# Altium PCB Mini Multi Function Device_F.PcbDoc (part 1 of 2)
Units mm, origin at the board's own origin, x right, y up, seen from the top; angles counter-clockwise.
Board outline 25.03 x 34.92 mm, 2 copper layers (Top Layer, Bottom Layer), stack 0.51 mm thick; 32 components, 32 nets, 155 pads, 45 vias.
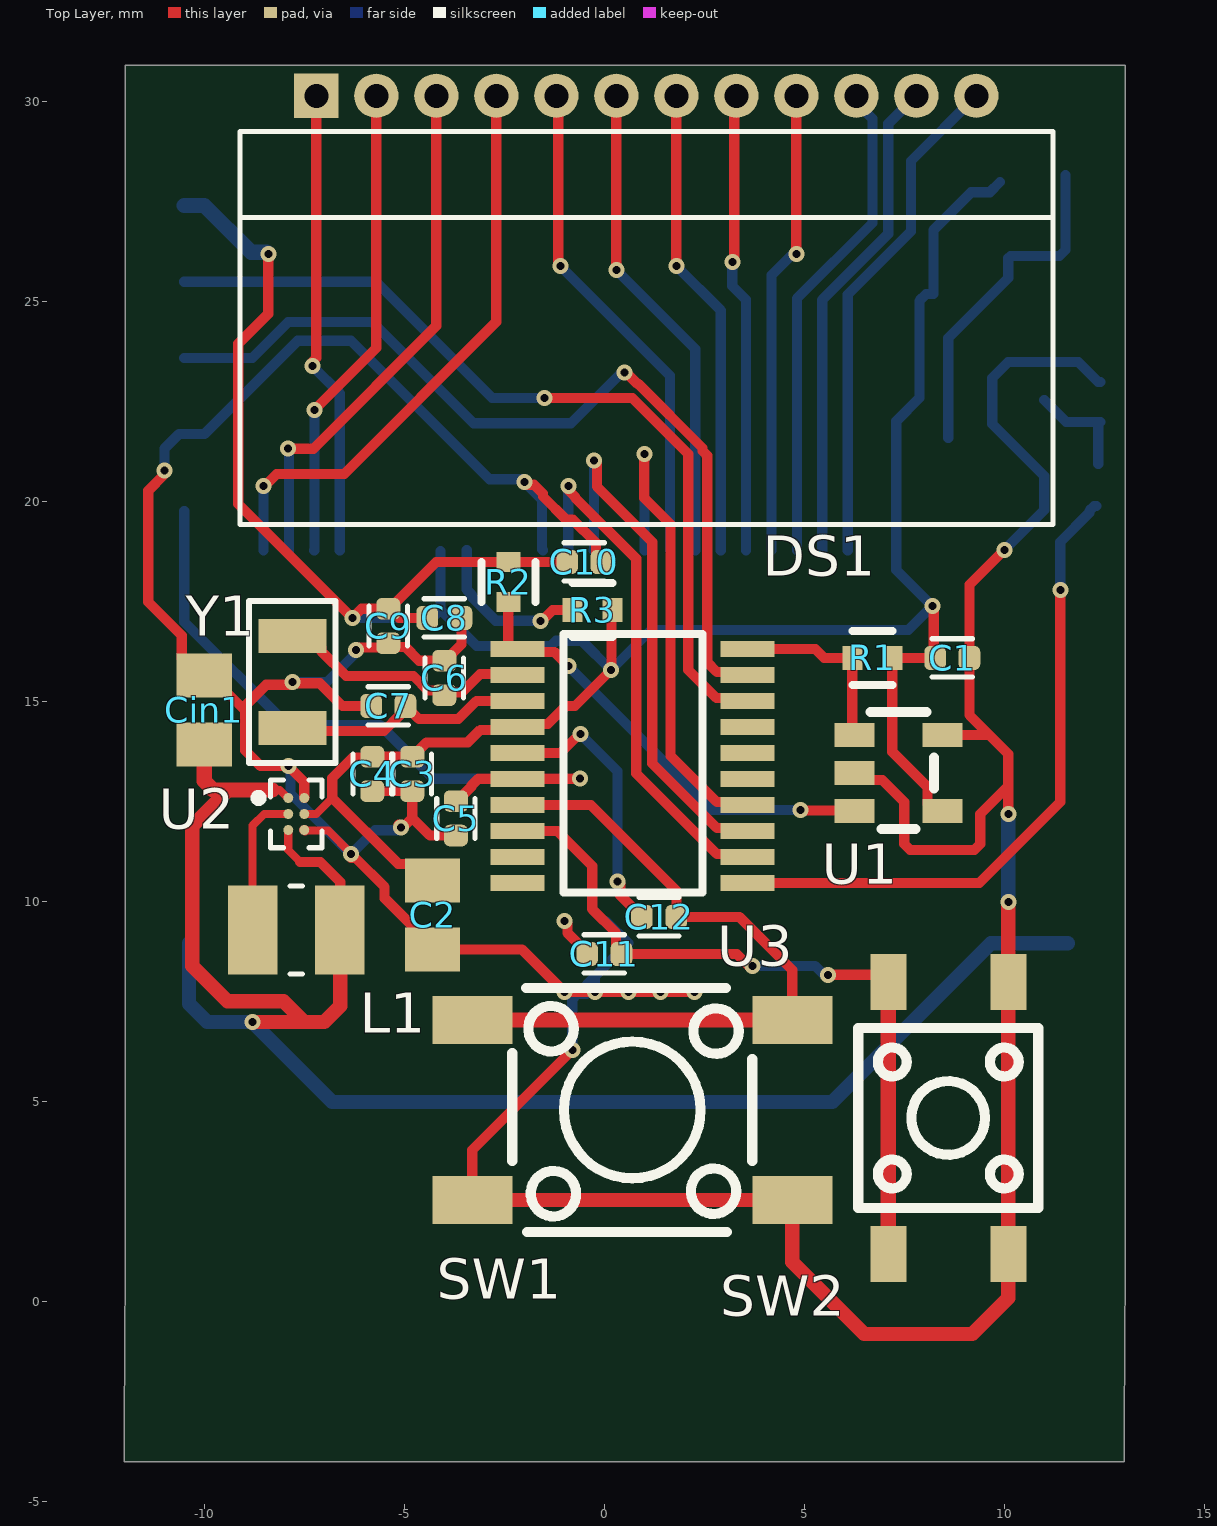
[diagram p0: Top Layer view]
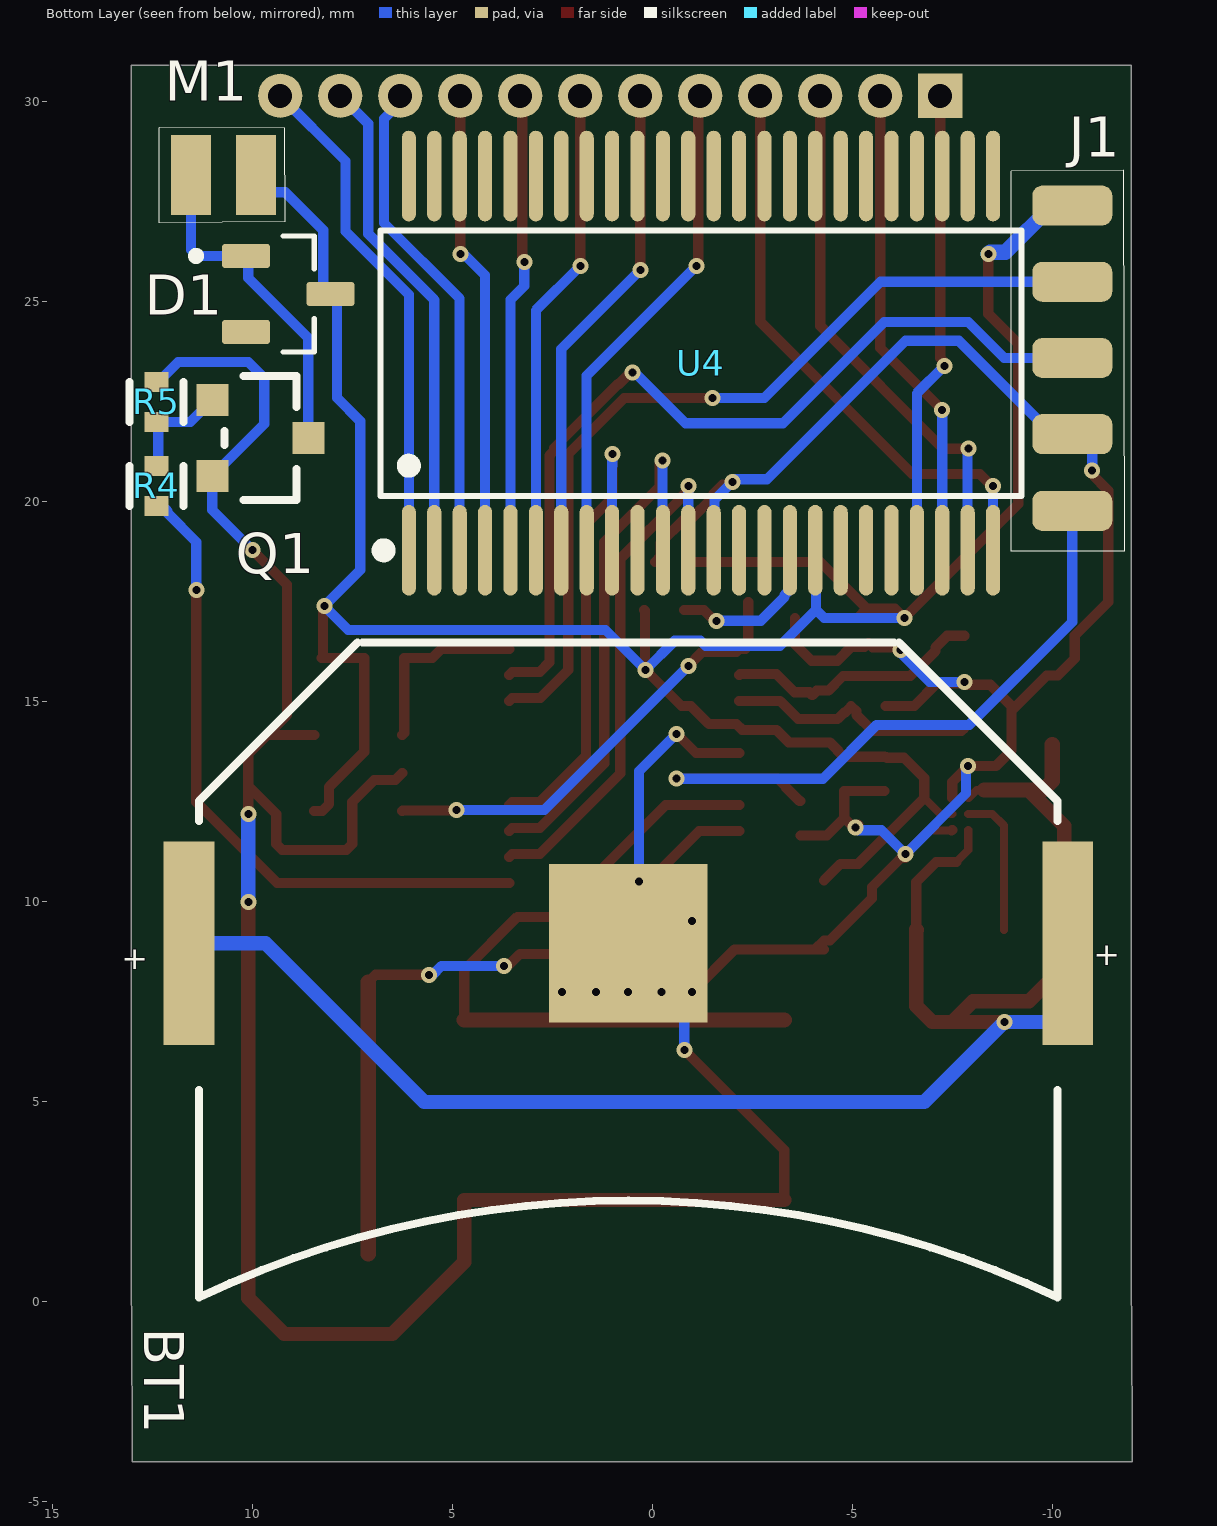
[diagram p1: Bottom Layer view, seen from below]
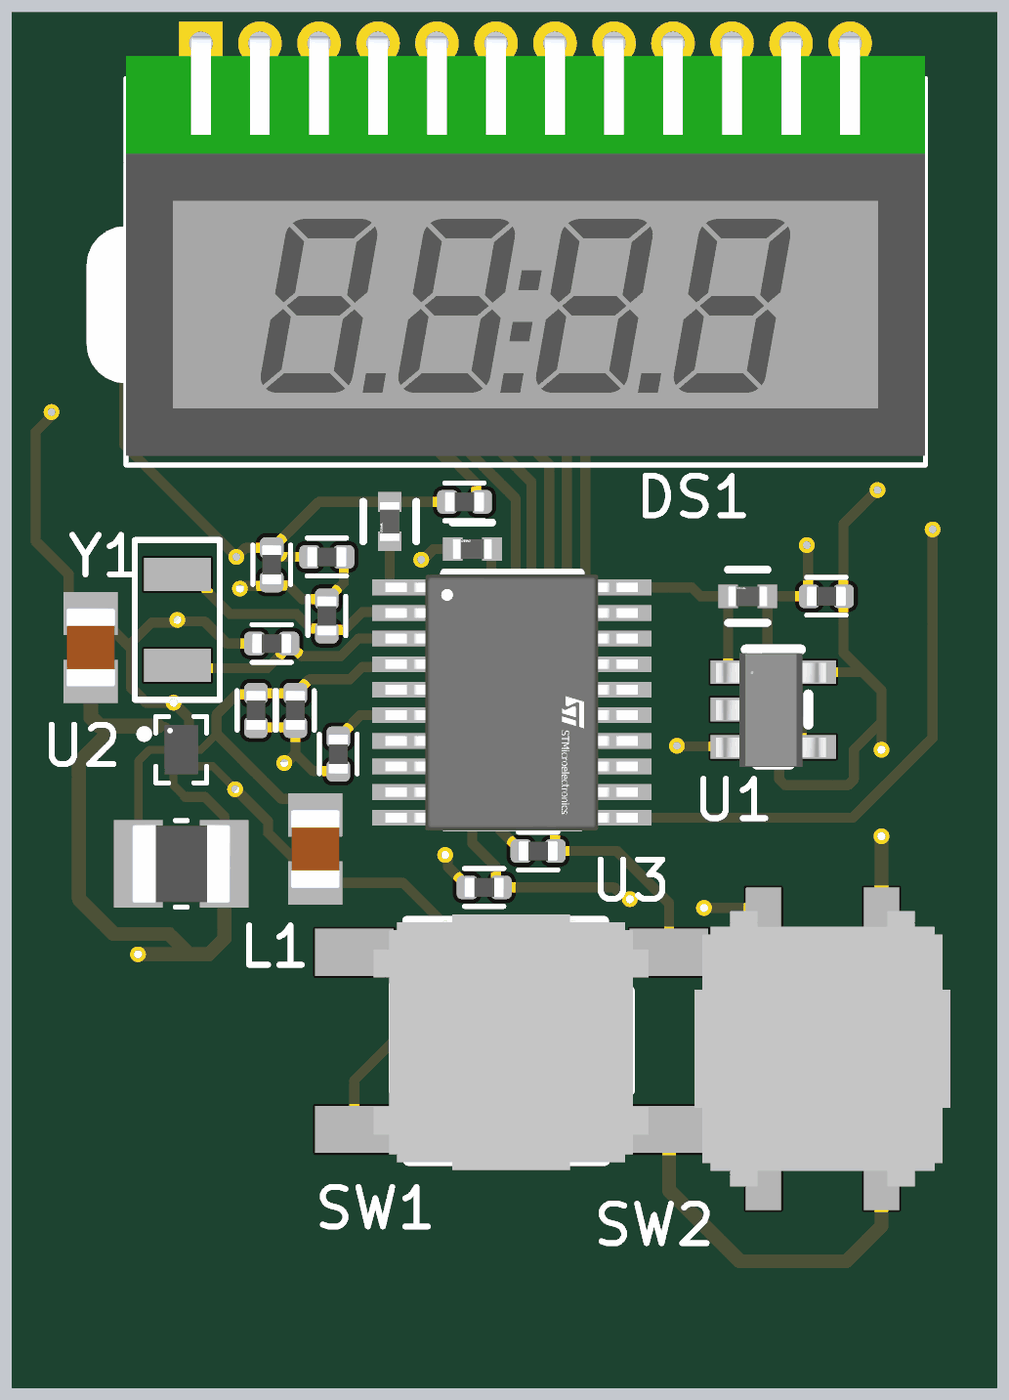
[diagram p2: 3D render of the assembled board from above, using the file's embedded part models]
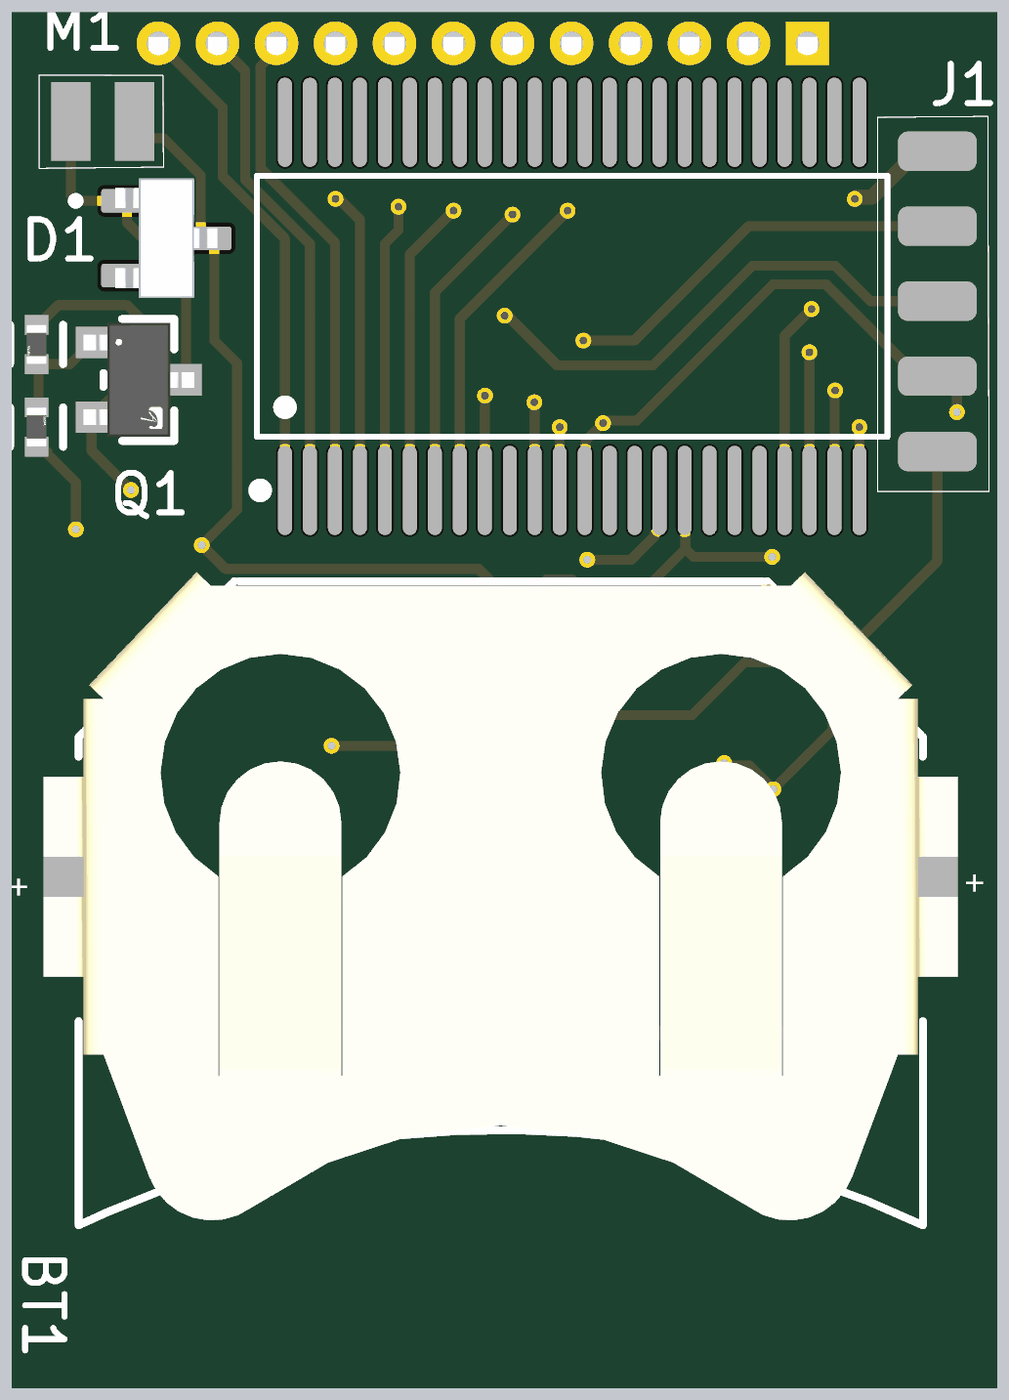
[diagram p3: 3D render of the assembled board from below, using the file's embedded part models]

## Layer stack, top to bottom
Top Solder: solder mask 0.0102, Solder Resist, Dk 3.5
Top Layer: signal copper 0.03
Dielectric 1: prepreg 0.45, PP-016, Dk 4.4
Bottom Layer: signal copper 0.03
Bottom Solder: solder mask 0.0102, Solder Resist, Dk 3.5

## Board outline
-12,-4 -12,-3.1 -11.975,0.9 -11.975,30.917 13.025,30.917 13.025,0.9 13,-3.1 13,-4

## Design rules (kind name [scope] priority, off if disabled: settings)
Clearance [All] p1: gap=0.2 ignorepadtopadclearanceinfootprint=FALSE except(0.1: Arc-SMDPad Track-SMDPad SMDPad-SMDPad; 0.102: Arc-Arc Arc-Track Track-Track; 0.15: SMDPad-Text)
HoleSize [All] p1: absolutevalues=TRUE maxlimit=2.54 minlimit=0.1 maxpercent=80.000 minpercent=20.000
HoleToHoleClearance [All] p1: gap=0.45 allowstackedmicrovias=TRUE
MinimumSolderMaskSliver [All] p1: minsoldermaskwidth=0.1
PolygonConnect [All] p1: connectstyle=Relief reliefconductorwidth=0.254 reliefentries=4 polygonreliefangle="90 Angle" airgapwidth=0.254
RoutingCorners [All] p1: cornerstyle=45-Degree minsetback=1 maxsetback=1
RoutingVias [All] p1: holewidth=0.15 width=0.25 viastyle="Through Hole" minholewidth=0.1 minwidth=0.2 maxholewidth=0.15 maxwidth=0.25
SilkToSilkClearance [All] p1: silktosilkclearance=0.1
SilkToSolderMaskClearance [IsPad] p1: minsilkscreentomaskgap=0.1 clearancetoexposedcopper=TRUE
SolderMaskExpansion [All] p1: expansion=0 istentingtop=FALSE
SupplyNets "Schematic Supply Nets_2" [InNet('+3V3')] p1: voltage=0.000
SupplyNets "Schematic Supply Nets" [InNet('GND')] p2: voltage=0.000
Width [All] p1: maxlimit=0.381 minlimit=0.102 preferedwidth=0.254
24 further rules are at their usual default settings.

## Components (designator, comment, footprint, x,y, rotation, side; value= is the part's Value field where it differs from the comment)
BT1 "Vin" FP-3034-MFG 0.6,8.3 r0 bottom
C1 "100nF" CAPACITOR 8.7,16.1 r180 top
C2 "22uF" CAPACITOR_0805 -4.293,9.677 r90 top
C3 "1uF" CAPACITOR -4.8,13.2 r90 top value=1µF
C4 "100nF" CAPACITOR -5.8,13.2 r90 top
C5 "100nF" CAPACITOR -3.708,12.09 r90 top
C6 "5.6pF" CAPACITOR -4,15.6 r270 top
C7 "5.6pF" CAPACITOR -5.4,14.9 r0 top
C8 "1uF" CAPACITOR -4,17.1 r180 top value=1µF
C9 "100nF" CAPACITOR -5.4,16.9 r90 top
C10 "1uF" CAPACITOR -0.5,18.5 r180 top value=1µF
C11 "100nF" CAPACITOR 0,8.7 r0 top
C12 "100nF" CAPACITOR 1.372,9.627 r0 top
Cin1 "10uF" CAPACITOR_0805 -10,14.8 r270 top
D1 "BAT54" SOT95P240X120-3N 9.1,25.2 r180 bottom value=10pF
DS1 "LCD-S401M16KR" LCD-S401M16KR -7.199,30.155 r0 top
J1 "SWD" SWD_HEADER -10.5,23.594 r270 bottom
L1 "2.2uH" INDC2520X100N -7.7,9.3 r180 top value=220µF
M1 "MOTOR" VCLP1020B002L 9.906,28.169 r0 bottom
Q1 "AO3400A" FP-SOT23-MFG 9.8,21.6 r180 bottom
R1 "4.7kΩ" RESISTOR 6.7,16.1 r180 top
R2 "4.7kΩ" RESISTOR -2.4,18 r270 top
R3 "20kΩ" RESISTOR -0.3,17.3 r180 top
R4 "100 Ω" RESISTOR 12.4,20.4 r90 bottom value=100Ω
R5 "100kΩ" RESISTOR 12.4,22.5 r270 bottom
SW1 "GT-TC089A-H100-L1" SW-SMD_4P-L6.0-W6.0-P4.50-LS8.5 0.7,4.8 r0 top
SW2 "GT-TC074A-H100-L1" SW-SMD_4P-L4.5-W4.5-P3.00-LS7.5 8.6,4.6 r90 top
U1 "EEPROM" AT24C02C-STUM-TQN 7.3,13.3 r180 top
U2 "TPS610994YFFR" BGA6N40P3X2_122X88X62N -7.7,12.2 r0 top
U3 "STM32G030F6P6" FP-TSSOP20-YA-MFG 0.7,13.4 r0 top
U4 "HT1621B-JSM" HT1621B-JSM -1.3,24 r180 bottom
Y1 "CRYSTAL" OSC-SMD_L3.2-W1.5 -7.8,15.5 r270 top

## Footprints (in the part's own frame and the unit in brackets; to place one, negate y for a bottom-side part, rotate by r counter-clockwise, add the part's x,y. Pads: shape width x height; smd on the part's side, far side on the other; paste and mask are expansions set on the pad)
AT24C02C-STUM-TQN [mm]
  rect 1x0.6 smd paste+0 mask+0.05: 1(1.049,-0.874) 2(1.049,0.076) 3(1.049,1.026) 4(-1.151,1.026) 5(-1.151,-0.874)
  silkscreen extent -0.94,-1.45 0.65,1.47, body extent -1.39,-1.36 1.41,1.54, height 1
BGA6N40P3X2_122X88X62N [mm]
  round 0.25 smd: A1(-0.2,0.4) A2(0.2,0.4) B1(-0.2,0) B2(0.2,0) C1(-0.2,-0.4) C2(0.2,-0.4)
  silkscreen extent -1.04,-0.84 0.64,0.84, body extent -0.43,-0.63 0.43,0.63, height 0.63
CAPACITOR [mm]
  rrect53% 0.54x0.6 smd paste+0 mask+0.102: 1(-0.43,0) 2(0.43,0)
  silkscreen extent -0.5,-0.48 0.5,0.48, body extent -0.5,-0.25 0.5,0.25, height 0.55
CAPACITOR_0805 [mm]
  rect 1.1x1.38 smd: 1(-0.863,0) 2(0.863,0)
  body extent -1,-0.63 1,0.63, height 1.35
FP-3034-MFG [mm]
  rect 3.96x3.96 smd paste-1000 mask+0: 1(0,-0.67)
  rect 1.27x5.08 smd paste+0 mask+0: 2(-10.985,-0.67) 2(10.985,-0.67)
  silkscreen extent -10.73,-8.19 10.73,8.19, body extent -11.62,-8.41 11.62,8.06, height 4.31
FP-SOT23-MFG [mm]
  rect 0.8x0.8 smd paste+0 mask+0: 1(-1.2,0.95) 2(-1.2,-0.95) 3(1.2,0)
  silkscreen extent -0.9,-1.55 0.9,1.55, body extent -1.41,-1.45 1.41,1.45, height 1.25
FP-TSSOP20-YA-MFG [mm]
  rect 1.35x0.4 smd paste+0 mask+0: 1(-2.875,2.925) 2(-2.875,2.275) 3(-2.875,1.625) 4(-2.875,0.975) 5(-2.875,0.325) 6(-2.875,-0.325) 7(-2.875,-0.975) 8(-2.875,-1.625) 9(-2.875,-2.275) 10(-2.875,-2.925) 11(2.875,-2.925) 12(2.875,-2.275) 13(2.875,-1.625) 14(2.875,-0.975) 15(2.875,-0.325) 16(2.875,0.325) 17(2.875,0.975) 18(2.875,1.625) 19(2.875,2.275) 20(2.875,2.925)
  silkscreen extent -1.72,-3.16 1.75,3.3, body extent -3.65,-3.55 3.65,3.55, height 0.25
HT1621B-JSM [mil] "-40℃~+85℃ 0.1uA 1/3,1/2 1/4,1/3,1/2 2.4V~5.2V 256kHz 3-Wire Serial Interface 32 Segment 32x4 bit 60uA LQFP-44(10x10) LCD Drivers ROHS"
  oval 14x89.24 smd paste+0 mask+2: 1(-290.75,-205.09) 2(-265.75,-205.09) 3(-240.75,-205.09) 4(-215.75,-205.09) 5(-190.75,-205.09) 6(-165.75,-205.09) 7(-140.75,-205.09) 8(-115.75,-205.09) 9(-90.75,-205.09) 10(-65.75,-205.09) 11(-40.75,-205.09) 12(-15.75,-205.09) 13(9.25,-205.09) 14(34.25,-205.09) 15(59.25,-205.09) 16(84.25,-205.09) 17(109.25,-205.09) 18(134.25,-205.09) 19(159.25,-205.09) 20(184.25,-205.09) 21(209.25,-205.09) 22(234.25,-205.09) 23(259.25,-205.09) 24(284.25,-205.09) 25(284.25,163.29) 26(259.25,163.29) 27(234.25,163.29) 28(209.25,163.29) 29(184.25,163.29) 30(159.25,163.29) 31(134.25,163.29) 32(109.25,163.29) 33(84.25,163.29) 34(59.25,163.29) 35(34.25,163.29) 36(9.25,163.29) 37(-15.75,163.29) 38(-40.75,163.29) 39(-65.75,163.29) 40(-90.75,163.29) 41(-115.75,163.29) 42(-140.75,163.29) 43(-165.75,163.29) 44(-190.75,163.29) 45(-215.75,163.29) 46(-240.75,163.29) 47(-265.75,163.29) 48(-290.75,163.29)
  silkscreen extent -321,-211 312,110, body extent -319,-153 310,111, height 39
INDC2520X100N [mm]
  rect 1.24x2.22 smd: 1(-1.09,0) 2(1.09,0)
  silkscreen extent -0.15,-1.1 0.15,1.1, body extent -1.25,-1 1.25,1, height 1
LCD-S401M16KR [mm]
  rect 1.108x1.108 / inner round 1.108 / far side rect 1.108x1.108 hole 0.6: 1(0,0)
  round 1.108 hole 0.6: 2(1.5,0) 3(3,0) 4(4.5,0) 5(6,0) 6(7.5,0) 7(9,0) 8(10.5,0) 9(12,0) 10(13.5,0) 11(15,0) 12(16.5,0)
  silkscreen extent -1.91,-10.72 18.41,-0.89, body extent -2.91,-10.49 18.41,0.18, height 2.9
OSC-SMD_L3.2-W1.5 [mm]
  rect 0.85x1.7 smd paste+0 mask+0.051: 1(-1.155,0) 2(1.155,0)
  silkscreen extent -2.03,-1.08 2.03,1.08, body extent -1.79,-0.98 1.79,0.98, height 0.76
RESISTOR [mm]
  rect 0.5x0.6 smd paste+0 mask+0: 1(-0.5,0) 2(0.5,0)
  silkscreen extent -0.5,-0.67 0.5,0.67, body extent -0.85,-0.4 0.85,0.4, height 0.25
SOT95P240X120-3N [mm]
  rrect25% 1.2x0.6 smd paste+0 mask+0.102: 1(-1.055,0.95) 2(-1.055,-0.95) 3(1.055,0)
  silkscreen extent -2.4,-1.45 0.65,1.45, body extent -1.3,-1.52 1.3,1.52, height 1.3
SW-SMD_4P-L4.5-W4.5-P3.00-LS7.5 [mm]
  rect 1.4x0.9 smd paste+0 mask+0.051: 1(-3.4,1.5) 2(3.4,1.5) 3(-3.4,-1.5) 4(3.4,-1.5)
  silkscreen extent -2.25,-2.25 2.25,2.25, body extent -3.5,-3.25 3.5,3.25, height 5.1
SW-SMD_4P-L6.0-W6.0-P4.50-LS8.5 [mm]
  rect 2x1.2 smd paste+0 mask+0.051: 1(-4,2.25) 2(4,2.25) 3(-4,-2.25) 4(4,-2.25)
  silkscreen extent -3,-3.05 3,3.05, body extent -3.52,-3.28 3.48,3.22, height 5.1
SWD_HEADER [mm]
  rrect50% 1x2 smd: 1(-3.816,0) 2(-1.911,0) 3(-0.006,0) 4(1.899,0) 5(3.816,0)
  silkscreen extent -4.7,-1.52 4.83,1.31
VCLP1020B002L [mm]
  rect 1x2 smd: 1(0,0) 2(1.625,0)
  silkscreen extent -0.73,-1.18 2.43,1.19

## Part data
BT1: library part 3034, "Retainer 1 Button cell Ø20.0mm 2020，2025，2032 PCBinstall，SMD mount 4.06mm(height)", Manufacturer=Keystone, Supplier Part Number=36-3034-ND, Category="Batteries and Accessories", ComponentLink1Description=https://datasheet.octopart.com:443/3034-Keystone-datasheet-137334392.pdf?src-supplier=Upverter, ComponentLink1URL=https://datasheet.octopart.com:443/3034-Keystone-datasheet-137334392.pdf?src-supplier=Upverter, ComponentLink2Description=https://datasheet.octopart.com:443/3034-Keystone-datasheet-15715878.pdf?src-supplier=Keystone, ComponentLink2URL=https://datasheet.octopart.com:443/3034-Keystone-datasheet-15715878.pdf?src-supplier=Keystone, ComponentLink3Description=https://datasheet.octopart.com:443/3034-Keystone-datasheet-16749974.pdf?src-supplier=element14+APAC, ComponentLink3URL=https://datasheet.octopart.com:443/3034-Keystone-datasheet-16749974.pdf?src-supplier=element14+APAC, ComponentLink4Description=https://datasheet.octopart.com:443/3034-Keystone-datasheet-110726686.pdf?src-supplier=Farnell, ComponentLink4URL=https://datasheet.octopart.com:443/3034-Keystone-datasheet-110726686.pdf?src-supplier=Farnell, ComponentLink5Description=https://datasheet.octopart.com:443/3034-Keystone-datasheet-159768223.pdf?src-supplier=TME, ComponentLink5URL=https://datasheet.octopart.com:443/3034-Keystone-datasheet-159768223.pdf?src-supplier=TME, ComponentLink6Description=https://datasheet.octopart.com:443/3034-Keystone-datasheet-62113088.pdf?src-supplier=RS+(Formerly+Allied+Electronics), ComponentLink6URL=https://datasheet.octopart.com:443/3034-Keystone-datasheet-62113088.pdf?src-supplier=RS+(Formerly+Allied+Electronics), ComponentLink7Description=https://datasheet.octopart.com:443/3034-Keystone-datasheet-24992608.pdf?src-supplier=Future+Electronics, ComponentLink7URL=https://datasheet.octopart.com:443/3034-Keystone-datasheet-24992608.pdf?src-supplier=Future+Electronics, Contact Material=Nickel, Contact Plating=Tin, Height=4.31mm, Lead Free="Lead Free", Lifecycle Status=Production, Manufacturer Part Number=3034, Mounting Technology="PCB, Surface Mount", Number of Batteries=1, Number of Cells=1, Number of Contacts=2, Pricing="1=0.52, 10=0.43, 25=0.3996, 100=0.3571, 500=0.31354, 1000=0.29647, 2500=0.2753, 5000=0.2603 (USD)", REACH SVHC=Unaffected, RoHS=Compliant, Stock=45307, Supplier=DigiKey, Termination=SMD/SMT
C1 C5 C9: library part CC0402JRX5R6BB104, "Ceramic Capacitor, Ceramic, 10V, 5% +Tol, 5% -Tol, X5R, 15% TC, 0.1uF, Surface Mount, 0402", Case/Package=0402, Dielectric=X5R, Dielectric Material=Ceramic, LCSC PART=C2185597, Manufacturer="Yageo Group", Max Operating Temperature=85°C, Min Operating Temperature=-55°C, Supplier Part Number=13-CC0402JRX5R6BB104CT-ND, Tolerance=5%, Voltage Rating=10V, Category="Ceramic Capacitors", China RoHS=Compliant, ComponentLink1Description=https://datasheet.octopart.com:443/CC0402JRX5R6BB104-Yageo-datasheet-145016144.pdf?src-supplier=IHS, ComponentLink1URL=https://datasheet.octopart.com:443/CC0402JRX5R6BB104-Yageo-datasheet-145016144.pdf?src-supplier=IHS, ComponentLink2Description=https://datasheet.octopart.com:443/CC0402JRX5R6BB104-Yageo-datasheet-149070021.pdf?src-supplier=TME, ComponentLink2URL=https://datasheet.octopart.com:443/CC0402JRX5R6BB104-Yageo-datasheet-149070021.pdf?src-supplier=TME, ComponentLink3Description=https://datasheet.octopart.com/CC0402JRX5R6BB104-Yageo-datasheet-86397281.pdf, ComponentLink3URL=https://datasheet.octopart.com/CC0402JRX5R6BB104-Yageo-datasheet-86397281.pdf, ComponentLink4Description=http://sigma.octopart.com:80/conflict_mineral_statement/Yageo-company-3.pdf?src-supplier=Compliance+Statements, ComponentLink4URL=http://sigma.octopart.com:80/conflict_mineral_statement/Yageo-company-3.pdf?src-supplier=Compliance+Statements, ComponentLink5Description=http://sigma.octopart.com:80/rohs_statement/Yageo-company-2.pdf?src-supplier=Compliance+Statements, ComponentLink5URL=http://sigma.octopart.com:80/rohs_statement/Yageo-company-2.pdf?src-supplier=Compliance+Statements, Country of Origin="Mainland China, Taiwan", Depth=500µm, Export Control Classification Number (ECCN) Code=EAR99, Halogen Free="Halogen Free", Harmonized Tariff Schedule (HTS) Code=8532.24.00.20, Height=500µm, Introduction Date=2020-03-26, Lead Free="Lead Free", Length=1mm, Lifecycle Status=Production, Manufacturer Part Number=CC0402JRX5R6BB104, Mounting Technology="Surface Mount", Number of Terminals=2, Packaging="Tape and Reel", Pricing="1=0.1, 10=0.05, 50=0.034, 100=0.029, 500=0.02086 (USD)", REACH SVHC=Unaffected, RoHS=Compliant, Stock=348, Supplier=DigiKey, Thickness=558.8µm, Voltage Rating (DC)=10V, Width=500µm
C2: library part 0805X226M6R3CT, "22uF 6.3V X5R ±20% 0805 Multilayer Ceramic Capacitors MLCC - SMD/SMT ROHS"
C3 C8 C10: library part CL05A105KO5NNNC, "16V 1uF X5R 卤10% 0402 Multilayer Ceramic Capacitors MLCC - SMD/SMT ROHS", Case Code (Imperial)=0402, Case Code (Metric)=1005, Dielectric=X5R, Dielectric Material=Ceramic, Manufacturer="Samsung Electro-Mechanics", Max Operating Temperature=85°C, Min Operating Temperature=-55°C, Supplier Part Number=1276-1067-6-ND, Tolerance=10%, Voltage=16V, Case/Package=0402, Category="Ceramic Capacitors", China RoHS=Compliant, ComponentLink1Description=https://datasheet.octopart.com:443/CL05A105KO5NNNC-Samsung-Electro-Mechanics-datasheet-181960514.pdf?src-supplier=IHS, ComponentLink1URL=https://datasheet.octopart.com:443/CL05A105KO5NNNC-Samsung-Electro-Mechanics-datasheet-181960514.pdf?src-supplier=IHS, ComponentLink2Description=https://datasheet.octopart.com:443/CL05A105KO5NNNC-Samsung-Electro-Mechanics-datasheet-136031720.pdf?src-supplier=Samsung+SCT, ComponentLink2URL=https://datasheet.octopart.com:443/CL05A105KO5NNNC-Samsung-Electro-Mechanics-datasheet-136031720.pdf?src-supplier=Samsung+SCT, ComponentLink3Description=https://datasheet.octopart.com:443/CL05A105KO5NNNC-Samsung-Electro-Mechanics-datasheet-11776774.pdf?src-supplier=Future+Electronics, ComponentLink3URL=https://datasheet.octopart.com:443/CL05A105KO5NNNC-Samsung-Electro-Mechanics-datasheet-11776774.pdf?src-supplier=Future+Electronics, ComponentLink4Description=https://datasheet.octopart.com:443/CL05A105KO5NNNC-Samsung-Electro-Mechanics-datasheet-110226202.pdf?src-supplier=Future+Electronics, ComponentLink4URL=https://datasheet.octopart.com:443/CL05A105KO5NNNC-Samsung-Electro-Mechanics-datasheet-110226202.pdf?src-supplier=Future+Electronics, ComponentLink5Description=https://datasheet.octopart.com:443/CL05A105KO5NNNC-Samsung-Electro-Mechanics-datasheet-81461590.pdf?src-supplier=Future+Electronics, ComponentLink5URL=https://datasheet.octopart.com:443/CL05A105KO5NNNC-Samsung-Electro-Mechanics-datasheet-81461590.pdf?src-supplier=Future+Electronics, ComponentLink6Description=https://datasheet.octopart.com:443/CL05A105KO5NNNC-Samsung-datasheet-42280519.pdf?src-supplier=Future+Electronics, ComponentLink6URL=https://datasheet.octopart.com:443/CL05A105KO5NNNC-Samsung-datasheet-42280519.pdf?src-supplier=Future+Electronics, ComponentLink7Description=https://datasheet.octopart.com:443/CL05A105KO5NNNC-Samsung-datasheet-34152987.pdf?src-supplier=Future+Electronics, ComponentLink7URL=https://datasheet.octopart.com:443/CL05A105KO5NNNC-Samsung-datasheet-34152987.pdf?src-supplier=Future+Electronics, ComponentLink8Description=https://datasheet.octopart.com:443/CL05A105KO5NNNC-Samsung-datasheet-8329584.pdf?src-supplier=Future+Electronics, ComponentLink8URL=https://datasheet.octopart.com:443/CL05A105KO5NNNC-Samsung-datasheet-8329584.pdf?src-supplier=Future+Electronics, ComponentLink9Description=https://datasheet.octopart.com:443/CL05A105KO5NNNC-Samsung-Electro-Mechanics-datasheet-149136633.pdf?src-supplier=Future+Electronics, ComponentLink9URL=https://datasheet.octopart.com:443/CL05A105KO5NNNC-Samsung-Electro-Mechanics-datasheet-149136633.pdf?src-supplier=Future+Electronics, ComponentLink10Description=https://datasheet.octopart.com/CL05A105KO5NNNC-Samsung-Electro-Mechanics-datasheet-97040617.pdf, ComponentLink10URL=https://datasheet.octopart.com/CL05A105KO5NNNC-Samsung-Electro-Mechanics-datasheet-97040617.pdf, ComponentLink11Description=https://datasheet.octopart.com/CL05A105KO5NNNC-Samsung-Electro-Mechanics-datasheet-8324245.pdf, ComponentLink11URL=https://datasheet.octopart.com/CL05A105KO5NNNC-Samsung-Electro-Mechanics-datasheet-8324245.pdf, ComponentLink12Description=https://datasheet.octopart.com:443/CL05A105KO5NNNC-Samsung-datasheet-59220082.pdf?src-supplier=TME, ComponentLink12URL=https://datasheet.octopart.com:443/CL05A105KO5NNNC-Samsung-datasheet-59220082.pdf?src-supplier=TME, Contact Plating=Tin, Depth=500µm, Height=550µm, Length=1mm, Lifecycle Status=Production, Manufacturer Part Number=CL05A105KO5NNNC, Material=Ceramic, Mounting Technology="Surface Mount", Number of Terminals=2, Pricing="1=0.1, 10=0.043, 50=0.029, 100=0.0248, 500=0.01786 (USD)", Radiation Hardening=No, REACH SVHC=Unaffected, RoHS=Compliant, Schedule B="8532240020, 8532240020|8532240020, 8532240020|8532240020|8532240020, 8532240020|8532240020|8532240020|8532240020", Stock=1053248, Supplier=DigiKey, Thickness=558.8µm, Voltage Rating=16V, Voltage Rating (DC)=16V, Width=500µm
C4 C11 C12: library part FCC0402B104K160AT, "FCC0402B104K160AT 100nF ±10% 16V Ceramic Capacitor X7R 0402 Ceramic Capacitors  100nF   16V 10%", LCSC PART=C5137468
C6 C7: library part 0402CG5R6C100NT, "10V 5.6pF C0G 0402 Multilayer Ceramic Capacitors MLCC - SMD/SMT ROHS", LCSC PART=C285041
Cin1: library part GRM21BR61A106KE19L, "10V 10uF X5R ±10% 0805 Multilayer Ceramic Capacitors MLCC - SMD/SMT ROHS", LCSC PART=C77073
D1: "Diode Schottky 30V 0.2A Automotive 3-Pin SOT-23", Case/Package=SOT-23, Current Rating=200mA, Forward Voltage=240mV, LCSC PART=C7528904, Manufacturer="Diodes Inc.", Max Forward Surge Current (Ifsm)=600mA, Max Operating Temperature=125°C, Max Power Dissipation=200mW, Max Repetitive Reverse Voltage (Vrrm)=30V, Max Reverse Leakage Current=2µA, Min Operating Temperature=-65°C, Reverse Standoff Voltage=25V, Category="Schottky Diodes", China RoHS=Non-Compliant, ComponentLink1Description=https://datasheet.octopart.com:443/BAT54-Rectron-datasheet-181184833.pdf?src-supplier=IHS, ComponentLink1URL=https://datasheet.octopart.com:443/BAT54-Rectron-datasheet-181184833.pdf?src-supplier=IHS, ComponentLink2Description=https://datasheet.octopart.com:443/BAT54-Lite-On-datasheet-149134416.pdf?src-supplier=IHS, ComponentLink2URL=https://datasheet.octopart.com:443/BAT54-Lite-On-datasheet-149134416.pdf?src-supplier=IHS, ComponentLink3Description=https://datasheet.octopart.com:443/BAT54-Rectron-datasheet-182306116.pdf?src-supplier=IHS, ComponentLink3URL=https://datasheet.octopart.com:443/BAT54-Rectron-datasheet-182306116.pdf?src-supplier=IHS, ComponentLink4Description=https://datasheet.octopart.com:443/BAT54-Diodes-Inc.-datasheet-181528020.pdf?src-supplier=IHS, ComponentLink4URL=https://datasheet.octopart.com:443/BAT54-Diodes-Inc.-datasheet-181528020.pdf?src-supplier=IHS, ComponentLink5Description=https://datasheet.octopart.com:443/BAT54-Diodes-Inc.-datasheet-180551406.pdf?src-supplier=IHS, ComponentLink5URL=https://datasheet.octopart.com:443/BAT54-Diodes-Inc.-datasheet-180551406.pdf?src-supplier=IHS, ComponentLink6Description=https://datasheet.octopart.com:443/BAT54-Diodes-Inc.-datasheet-181528181.pdf?src-supplier=IHS, ComponentLink6URL=https://datasheet.octopart.com:443/BAT54-Diodes-Inc.-datasheet-181528181.pdf?src-supplier=IHS, ComponentLink7Description=https://datasheet.octopart.com:443/BAT54-Diodes-Inc.-datasheet-180087920.pdf?src-supplier=IHS, ComponentLink7URL=https://datasheet.octopart.com:443/BAT54-Diodes-Inc.-datasheet-180087920.pdf?src-supplier=IHS, ComponentLink8Description=https://datasheet.octopart.com:443/BAT54-Diodes-Inc.-datasheet-180663379.pdf?src-supplier=IHS, ComponentLink8URL=https://datasheet.octopart.com:443/BAT54-Diodes-Inc.-datasheet-180663379.pdf?src-supplier=IHS, ComponentLink9Description=https://datasheet.octopart.com:443/BAT54-Zetex-datasheet-9882.pdf?src-supplier=IHS, ComponentLink9URL=https://datasheet.octopart.com:443/BAT54-Zetex-datasheet-9882.pdf?src-supplier=IHS, ComponentLink10Description=https://datasheet.octopart.com:443/BAT54-Diodes-Inc.-datasheet-180493470.pdf?src-supplier=IHS, ComponentLink10URL=https://datasheet.octopart.com:443/BAT54-Diodes-Inc.-datasheet-180493470.pdf?src-supplier=IHS, ComponentLink11Description=https://datasheet.octopart.com:443/BAT54-Diodes-Inc.-datasheet-182327183.pdf?src-supplier=IHS, ComponentLink11URL=https://datasheet.octopart.com:443/BAT54-Diodes-Inc.-datasheet-182327183.pdf?src-supplier=IHS, ComponentLink12Description=https://datasheet.octopart.com:443/BAT54-Diodes-Inc.-datasheet-548743.pdf?src-supplier=element14, ComponentLink12URL=https://datasheet.octopart.com:443/BAT54-Diodes-Inc.-datasheet-548743.pdf?src-supplier=element14, ComponentLink13Description=https://datasheet.octopart.com:443/BAT54-Diodes-Inc.-datasheet-41192442.pdf?src-supplier=Newark, ComponentLink13URL=https://datasheet.octopart.com:443/BAT54-Diodes-Inc.-datasheet-41192442.pdf?src-supplier=Newark, ComponentLink14Description=https://datasheet.octopart.com:443/BAT54-Diodes-Inc.-datasheet-134530442.pdf?src-supplier=Diodes+Inc+SCT, ComponentLink14URL=https://datasheet.octopart.com:443/BAT54-Diodes-Inc.-datasheet-134530442.pdf?src-supplier=Diodes+Inc+SCT, ComponentLink15Description=https://sigma.octopart.com:443/138706058/technical_drawing/Diodes-Inc.-BAT54.pdf?src-supplier=Diodes+Inc+SCT, ComponentLink15URL=https://sigma.octopart.com:443/138706058/technical_drawing/Diodes-Inc.-BAT54.pdf?src-supplier=Diodes+Inc+SCT, ComponentLink16Description=https://datasheet.octopart.com/BAT54-Diodes-Inc.-datasheet-11970926.pdf, ComponentLink16URL=https://datasheet.octopart.com/BAT54-Diodes-Inc.-datasheet-11970926.pdf, ComponentLink17Description=https://datasheet.octopart.com/BAT54-Diodes-Inc.-datasheet-10029091.pdf, ComponentLink17URL=https://datasheet.octopart.com/BAT54-Diodes-Inc.-datasheet-10029091.pdf, ComponentLink18Description=https://datasheet.octopart.com/BAT54-Diodes-Inc.-datasheet-5320128.pdf, ComponentLink18URL=https://datasheet.octopart.com/BAT54-Diodes-Inc.-datasheet-5320128.pdf, ComponentLink19Description=http://sigma.octopart.com:80/15540767/rohs_certificate/Diodes-Inc.-BAT54.pdf?src-supplier=Compliance+Statements, ComponentLink19URL=http://sigma.octopart.com:80/15540767/rohs_certificate/Diodes-Inc.-BAT54.pdf?src-supplier=Compliance+Statements, ComponentLink20Description=http://sigma.octopart.com:80/15616893/materials_sheet/Diodes-Inc.-BAT54.pdf?src-supplier=Compliance+Statements, ComponentLink20URL=http://sigma.octopart.com:80/15616893/materials_sheet/Diodes-Inc.-BAT54.pdf?src-supplier=Compliance+Statements, Country of Origin="Mainland China", Element Configuration=Single, Export Control Classification Number (ECCN) Code=EAR99, Forward Current=200mA, Harmonized Tariff Schedule (HTS) Code=8541.10.00.70, Introduction Date=1995-09-01, Lead Free="Lead Free", Lifecycle Status=Production, LTB Date=2021-08-06, LTD Date=2021-08-06, Manufacturer Part Number=BAT54, Max Output current=200mA, Min Breakdown Voltage=30V, Number of Elements=1, Number of Terminals=3, Output Current=200mA, Packaging="Cut Tape", Peak Reverse Current=2µA, Pins=3, Polarity=Standard, Power Dissipation=200mW, Power Rating=200mW, Pricing="1=0.222, 50=0.174, 100=0.11, 250=0.091, 500=0.079, 1000=0.065, 2500=0.053, 5000=0.051 (USD)", REACH SVHC=Affected, Reverse Recovery Time=5ns, RoHS=Compliant, Stock=48918, Supplier=Newark, Supplier Part Number=BAT54, Termination=SMD/SMT, Voltage Rating (DC)=30V, Width=3.05mm
DS1: "LCD Numeric Display Modules 4 Digit 0.17 7 Seg Reflective", Background Color=Grey, LCSC PART=C17355221, Manufacturer=Lumex, Max Operating Temperature=50°C, Min Operating Temperature=0°C, Nominal Supply Voltage (DC)=3V, Supplier Part Number=LCD-S401M16KR-ND, Category="LCD, OLED, Graphic Displays", China RoHS=Compliant, ComponentLink1Description=https://datasheet.octopart.com:443/LCD-S401M16KR-Lumex-datasheet-154837219.pdf?src-supplier=JRH+Electronics, ComponentLink1URL=https://datasheet.octopart.com:443/LCD-S401M16KR-Lumex-datasheet-154837219.pdf?src-supplier=JRH+Electronics, ComponentLink2Description=https://datasheet.octopart.com:443/LCD-S401M16KR-Lumex-datasheet-155954798.pdf?src-supplier=Future+Electronics, ComponentLink2URL=https://datasheet.octopart.com:443/LCD-S401M16KR-Lumex-datasheet-155954798.pdf?src-supplier=Future+Electronics, Lifecycle Status=Production, Manufacturer Part Number=LCD-S401M16KR, Number of Circuits=5, Operating Supply Voltage=3V, Packaging=Bulk, Pricing="1=2.07, 10=1.484, 100=1.1317, 864=0.93564, 1728=0.89114, 2592=0.86835, 5184=0.83419, 10368=0.80529 (USD)", REACH SVHC=Yes, RoHS=Compliant, Schedule B="8531200020, 8531200040, 8531200040|8531200040, 8531200040|8531200040|8531200040", Stock=6110, Supplier=DigiKey
J1: library part SWD_HEADER
L1: library part LQM2HPN2R2MG0L, "Inductor Power Chip Shielded Multi-Layer 2.2uH 20% 1MHz Ferrite 1.3A 0.1Ohm DCR 1008 T/R", Case Code (Imperial)=1008, Case Code (Metric)=2520, Current Rating=1.3A, DC Resistance (DCR)=100mΩ, Inductance Tolerance=20%, LCSC PART=C86092, Manufacturer=Murata, Manufacturer Lifecycle Status="IN PRODUCTION", Max Operating Temperature=125°C, Min Operating Temperature=-55°C, Self Resonant Frequency=40MHz, Supplier Part Number=490-5114-1-ND, Test Frequency=1MHz, Voltage Rating=50V, Case/Package=1008, Category="Fixed Inductors", ComponentLink1Description=https://datasheet.octopart.com:443/LQM2HPN2R2MG0L-Murata-datasheet-11799310.pdf?src-supplier=Upverter, ComponentLink1URL=https://datasheet.octopart.com:443/LQM2HPN2R2MG0L-Murata-datasheet-11799310.pdf?src-supplier=Upverter, ComponentLink2Description=https://datasheet.octopart.com:443/LQM2HPN2R2MG0L-Murata-datasheet-44660790.pdf?src-supplier=Upverter, ComponentLink2URL=https://datasheet.octopart.com:443/LQM2HPN2R2MG0L-Murata-datasheet-44660790.pdf?src-supplier=Upverter, ComponentLink3Description=https://datasheet.octopart.com:443/LQM2HPN2R2MG0L-Murata-datasheet-39128533.pdf?src-supplier=Newark, ComponentLink3URL=https://datasheet.octopart.com:443/LQM2HPN2R2MG0L-Murata-datasheet-39128533.pdf?src-supplier=Newark, ComponentLink4Description=https://datasheet.octopart.com:443/LQM2HPN2R2MG0L-Murata-datasheet-141288001.pdf?src-supplier=Ciiva, ComponentLink4URL=https://datasheet.octopart.com:443/LQM2HPN2R2MG0L-Murata-datasheet-141288001.pdf?src-supplier=Ciiva, ComponentLink5Description=https://datasheet.octopart.com:443/LQM2HPN2R2MG0L-Murata-datasheet-140714418.pdf?src-supplier=Ciiva, ComponentLink5URL=https://datasheet.octopart.com:443/LQM2HPN2R2MG0L-Murata-datasheet-140714418.pdf?src-supplier=Ciiva, ComponentLink6Description=https://datasheet.octopart.com:443/LQM2HPN2R2MG0L-Murata-datasheet-138755521.pdf?src-supplier=Ciiva, ComponentLink6URL=https://datasheet.octopart.com:443/LQM2HPN2R2MG0L-Murata-datasheet-138755521.pdf?src-supplier=Ciiva, ComponentLink7Description=https://datasheet.octopart.com:443/LQM2HPN2R2MG0L-Murata-datasheet-140710322.pdf?src-supplier=TME, ComponentLink7URL=https://datasheet.octopart.com:443/LQM2HPN2R2MG0L-Murata-datasheet-140710322.pdf?src-supplier=TME, ComponentLink8Description=https://datasheet.octopart.com:443/LQM2HPN2R2MG0L-Murata-datasheet-142045970.pdf?src-supplier=Arrow.cn, ComponentLink8URL=https://datasheet.octopart.com:443/LQM2HPN2R2MG0L-Murata-datasheet-142045970.pdf?src-supplier=Arrow.cn, ComponentLink9Description=https://datasheet.octopart.com:443/LQM2HPN2R2MG0L-Murata-datasheet-145450753.pdf?src-supplier=Geoflip, ComponentLink9URL=https://datasheet.octopart.com:443/LQM2HPN2R2MG0L-Murata-datasheet-145450753.pdf?src-supplier=Geoflip, ComponentLink10Description=https://datasheet.octopart.com:443/LQM2HPN2R2MG0L-Murata-datasheet-104455174.pdf?src-supplier=Future+Electronics, ComponentLink10URL=https://datasheet.octopart.com:443/LQM2HPN2R2MG0L-Murata-datasheet-104455174.pdf?src-supplier=Future+Electronics, ComponentLink11Description=https://datasheet.octopart.com/LQM2HPN2R2MG0L-Murata-datasheet-14392801.pdf, ComponentLink11URL=https://datasheet.octopart.com/LQM2HPN2R2MG0L-Murata-datasheet-14392801.pdf, ComponentLink12Description=http://sigma.octopart.com:80/reach_statement/Murata-company-16.pdf?src-supplier=Compliance+Statements, ComponentLink12URL=http://sigma.octopart.com:80/reach_statement/Murata-company-16.pdf?src-supplier=Compliance+Statements, Core Material=Ferrite, DC Current=1.3A, Depth=2.2mm, Diameter=10mm, ESR=100mΩ, Height=900µm, Height - Seated (Max)=990.6µm, Lead Free="Lead Free", Lead Pitch=5mm, Length=2.5mm, Lifecycle Status=Production, Manufacturer Part Number=LQM2HPN2R2MG0L, Max Current Rating=1.3A, Max DC Current=1.3A, Military Standard=Not, Mounting Technology="Through Hole", Number of Circuits=1, Number of Terminals=2, Packaging=Bulk, Pins=2, Pricing="1=0.17, 10=0.142, 100=0.1167, 1000=0.09599 (USD)", Radiation Hardening=No, REACH SVHC=Unaffected, RMS Current (Irms)=1.3A, RoHS=Compliant, Schedule B="8504500000, 8504500000|8504500000, 8504500000|8504500000|8504500000, 8504500000|8504500000|8504500000|8504500000", Shielding=Shielded, Stock=505234, Supplier=DigiKey, Termination=SMD/SMT, Tolerance=20%, Voltage Rating (DC)=50V, Width=2mm
M1: library part VCLP1020B002L, "Vibration Coin 3V Low Curr 0.75G", Manufacturer=Vybronics, Supplier Part Number=1670-VCLP1020B002L-ND, Category="AC, DC and Servo Motors", Manufacturer Part Number=VCLP1020B002L, Pricing="1=3.15, 5=2.892, 10=2.789, 25=2.658, 50=2.5628, 100=2.4713, 250=2.35528, 500=2.27116, 1000=2.19002 (USD)", Stock=4086, Supplier=DigiKey
Q1: "Trans MOSFET N-CH 30V 5.7A 3-Pin SOT-23", Case/Package=SOT-23, Continuous Drain Current (ID)=5.7A, Drain to Source Breakdown Voltage=30V, Drain to Source Resistance=26.5mΩ, Gate to Source Voltage (Vgs)=12V, Input Capacitance=630pF, LCSC PART=C20917, Manufacturer="Alpha & Omega Semiconductor", Max Junction Temperature (Tj)=150°C, Max Power Dissipation=1.4W, Min Operating Temperature=-55°C, Supplier Part Number=785-1000-6-ND, Threshold Voltage=650mV, Category=MOSFETs, ComponentLink1Description=https://sigma.octopart.com:443/140150677/technical_drawing/Alpha-%26-Omega-Semiconductor-AO3400A.pdf?src-supplier=Alpha+%26+Omega+Semiconductor+SCT, ComponentLink1URL=https://sigma.octopart.com:443/140150677/technical_drawing/Alpha-%26-Omega-Semiconductor-AO3400A.pdf?src-supplier=Alpha+%26+Omega+Semiconductor+SCT, ComponentLink2Description=https://datasheet.octopart.com:443/AO3400A-Alpha-%26-Omega-Semiconductor-datasheet-11777925.pdf?src-supplier=IHS, ComponentLink2URL=https://datasheet.octopart.com:443/AO3400A-Alpha-%26-Omega-Semiconductor-datasheet-11777925.pdf?src-supplier=IHS, ComponentLink3Description=https://sigma.octopart.com:443/138895710/technical_drawing/Alpha-%26-Omega-Semiconductor-AO3400A.pdf?src-supplier=Upverter, ComponentLink3URL=https://sigma.octopart.com:443/138895710/technical_drawing/Alpha-%26-Omega-Semiconductor-AO3400A.pdf?src-supplier=Upverter, ComponentLink4Description=https://datasheet.octopart.com:443/AO3400A-Alpha-%26-Omega-Semiconductor-datasheet-14060799.pdf?src-supplier=iiiC, ComponentLink4URL=https://datasheet.octopart.com:443/AO3400A-Alpha-%26-Omega-Semiconductor-datasheet-14060799.pdf?src-supplier=iiiC, ComponentLink5Description=https://datasheet.octopart.com:443/AO3400A-Alpha-%26-Omega-Semiconductor-datasheet-5402508.pdf?src-supplier=Verical, ComponentLink5URL=https://datasheet.octopart.com:443/AO3400A-Alpha-%26-Omega-Semiconductor-datasheet-5402508.pdf?src-supplier=Verical, Country of Origin="Mainland China", Drain to Source Voltage (Vdss)=30V, Export Control Classification Number (ECCN) Code=EAR99, Height=1.25mm, Introduction Date=2007-04-17, Lead Free="Lead Free", Lifecycle Status=Production, Manufacturer Part Number=AO3400A, Max Operating Temperature=150°C, Min Breakdown Voltage=30V, Mounting Technology="Surface Mount", Number of Channels=1, Number of Elements=1, Number of Terminals=3, Pins=3, Power Dissipation=1.4W, Pricing="1=0.52, 10=0.322, 50=0.2332, 100=0.2043, 500=0.15316 (USD)", Radiation Hardening=No, Rds On Max=26.5mΩ, REACH SVHC=Unaffected, RoHS=Compliant, Schedule B="8541290080, 8541290080|8541290080|8541290080|8541290080|8541290080", Stock=64557, Supplier=DigiKey, Turn-Off Delay Time=25ns, Turn-On Delay Time=3ns
R1 R2: library part CRF0402R472JN, "-55℃~+125℃ 30V 4.7kΩ 62.5mW ±5% ±50ppm/℃ 0402 Chip Resistor - Surface Mount ROHS", LCSC PART=C54974059
R3: library part AR02DTD2002, "-55℃~+155℃ 20kΩ 25V 62.5mW Thin Film Resistor ±0.5% ±50ppm/℃ 0402 Chip Resistor - Surface Mount ROHS", LCSC PART=C319759
R4: library part AC0402JR-07100RL, "Res Thick Film 0402 100 Ohm 5% 0.063W(1/16W) ±100ppm/C Pad SMD T/R Automotive AEC-Q200", Case Code (Imperial)=0402, Case Code (Metric)=1005, LCSC PART=C138288, Manufacturer="Yageo Group", Max Operating Temperature=155°C, Max Power Dissipation=63mW, Min Operating Temperature=-55°C, Power Rating=62.5mW, Ratings=AEC-Q200, Supplier Part Number=YAG3516CT-ND, Temperature Coefficient=100ppm/°C, Tolerance=5%, Voltage Rating=50V, Case/Package=0402, Category="Chip SMD Resistors", China RoHS=Non-Compliant, ComponentLink1Description=https://datasheet.octopart.com:443/AC0402JR-07100RL-Yageo-datasheet-182189377.pdf?src-supplier=IHS, ComponentLink1URL=https://datasheet.octopart.com:443/AC0402JR-07100RL-Yageo-datasheet-182189377.pdf?src-supplier=IHS, ComponentLink2Description=https://datasheet.octopart.com:443/AC0402JR-07100RL-Yageo-datasheet-83209224.pdf?src-supplier=Upverter, ComponentLink2URL=https://datasheet.octopart.com:443/AC0402JR-07100RL-Yageo-datasheet-83209224.pdf?src-supplier=Upverter, ComponentLink3Description=https://datasheet.octopart.com:443/AC0402JR-07100RL-Yageo-datasheet-178509465.pdf?src-supplier=Newark, ComponentLink3URL=https://datasheet.octopart.com:443/AC0402JR-07100RL-Yageo-datasheet-178509465.pdf?src-supplier=Newark, ComponentLink4Description=https://datasheet.octopart.com:443/AC0402JR-07100RL-Yageo-Group-datasheet-188689268.pdf?src-supplier=LCSC, ComponentLink4URL=https://datasheet.octopart.com:443/AC0402JR-07100RL-Yageo-Group-datasheet-188689268.pdf?src-supplier=LCSC, ComponentLink5Description=https://datasheet.octopart.com:443/AC0402JR-07100RL-Yageo-datasheet-151884373.pdf?src-supplier=Future+Electronics, ComponentLink5URL=https://datasheet.octopart.com:443/AC0402JR-07100RL-Yageo-datasheet-151884373.pdf?src-supplier=Future+Electronics, ComponentLink6Description=https://datasheet.octopart.com:443/AC0402JR-07100RL-Yageo-Group-datasheet-189830439.pdf?src-supplier=Future+Electronics, ComponentLink6URL=https://datasheet.octopart.com:443/AC0402JR-07100RL-Yageo-Group-datasheet-189830439.pdf?src-supplier=Future+Electronics, ComponentLink7Description=https://datasheet.octopart.com:443/AC0402JR-07100RL-Yageo-datasheet-166720450.pdf?src-supplier=Future+Electronics, ComponentLink7URL=https://datasheet.octopart.com:443/AC0402JR-07100RL-Yageo-datasheet-166720450.pdf?src-supplier=Future+Electronics, ComponentLink8Description=https://datasheet.octopart.com:443/AC0402JR-07100RL-Yageo-datasheet-137699919.pdf?src-supplier=Future+Electronics, ComponentLink8URL=https://datasheet.octopart.com:443/AC0402JR-07100RL-Yageo-datasheet-137699919.pdf?src-supplier=Future+Electronics, ComponentLink9Description=https://datasheet.octopart.com:443/AC0402JR-07100RL-Yageo-datasheet-62139191.pdf?src-supplier=Future+Electronics, ComponentLink9URL=https://datasheet.octopart.com:443/AC0402JR-07100RL-Yageo-datasheet-62139191.pdf?src-supplier=Future+Electronics, ComponentLink10Description=https://datasheet.octopart.com:443/AC0402JR-07100RL-Yageo-datasheet-58829331.pdf?src-supplier=Future+Electronics, ComponentLink10URL=https://datasheet.octopart.com:443/AC0402JR-07100RL-Yageo-datasheet-58829331.pdf?src-supplier=Future+Electronics, ComponentLink11Description=https://datasheet.octopart.com:443/AC0402JR-07100RL-Yageo-datasheet-128678457.pdf?src-supplier=X-ON, ComponentLink11URL=https://datasheet.octopart.com:443/AC0402JR-07100RL-Yageo-datasheet-128678457.pdf?src-supplier=X-ON, ComponentLink12Description=https://datasheet.octopart.com/AC0402JR-07100RL-Yageo-datasheet-12512238.pdf, ComponentLink12URL=https://datasheet.octopart.com/AC0402JR-07100RL-Yageo-datasheet-12512238.pdf, ComponentLink13Description=http://sigma.octopart.com:80/conflict_mineral_statement/Yageo-company-3.pdf?src-supplier=Compliance+Statements, ComponentLink13URL=http://sigma.octopart.com:80/conflict_mineral_statement/Yageo-company-3.pdf?src-supplier=Compliance+Statements, ComponentLink14Description=http://sigma.octopart.com:80/rohs_statement/Yageo-company-2.pdf?src-supplier=Compliance+Statements, ComponentLink14URL=http://sigma.octopart.com:80/rohs_statement/Yageo-company-2.pdf?src-supplier=Compliance+Statements, Composition="Thick Film", Country of Origin="Mainland China, Taiwan", Depth=500µm, Export Control Classification Number (ECCN) Code=EAR99, Features="Automotive AEC-Q200, Moisture Resistant", Harmonized Tariff Schedule (HTS) Code=8533.21.00.30, Height=320µm, Introduction Date=2012-04-10, Length=1mm, Lifecycle Status=Production, Manufacturer Part Number=AC0402JR-07100RL, Military Standard=Not, Mounting Technology="Surface Mount", Number of Terminals=2, Number of Terminations=2, Packaging="Tape & Reel", Pricing="1=0.1, 10=0.022, 25=0.0164, 50=0.013, 100=0.0105, 250=0.00804, 500=0.00666, 1000=0.00558, 5000=0.0039 (USD)", REACH SVHC=Unaffected, RoHS=Compliant, Schedule B="8533210045, 8533210045|8533210045, 8533210045|8533210045|8533210045, 8533210045|8533210045|8533210045|8533210045", Stock=671269, Supplier=DigiKey, Termination=SMD/SMT, Weight=652.039032µg, Width=500µm, Working Voltage=50V
R5: library part RC0402JR-07100KL, "62.5mW Thick Film Resistors 50V ±100ppm/℃ ±5% 100kΩ 0402 Chip Resistor - Surface Mount ROHS", Case Code (Imperial)=0402, LCSC PART=C106234, Manufacturer="Yageo Group", Max Operating Temperature=155°C, Max Power Dissipation=63mW, Min Operating Temperature=-55°C, Power Rating=62.5mW, Supplier Part Number=311-100KJRCT-ND, Temperature Coefficient=100ppm/°C, Tolerance=5%, Voltage Rating=50V, Case/Package=0402, Category="Chip SMD Resistors", China RoHS=Non-Compliant, ComponentLink1Description=https://datasheet.octopart.com:443/RC0402JR-07100KL-Yageo-datasheet-175887523.pdf?src-supplier=Newark, ComponentLink1URL=https://datasheet.octopart.com:443/RC0402JR-07100KL-Yageo-datasheet-175887523.pdf?src-supplier=Newark, ComponentLink2Description=https://datasheet.octopart.com:443/RC0402JR-07100KL-Yageo-datasheet-10408619.pdf?src-supplier=Newark, ComponentLink2URL=https://datasheet.octopart.com:443/RC0402JR-07100KL-Yageo-datasheet-10408619.pdf?src-supplier=Newark, ComponentLink3Description=https://datasheet.octopart.com:443/RC0402JR-07100KL-Yageo-datasheet-8324527.pdf?src-supplier=Newark, ComponentLink3URL=https://datasheet.octopart.com:443/RC0402JR-07100KL-Yageo-datasheet-8324527.pdf?src-supplier=Newark, ComponentLink4Description=https://datasheet.octopart.com:443/RC0402JR-07100KL-Yageo-datasheet-141265859.pdf?src-supplier=Upverter, ComponentLink4URL=https://datasheet.octopart.com:443/RC0402JR-07100KL-Yageo-datasheet-141265859.pdf?src-supplier=Upverter, ComponentLink5Description=https://sigma.octopart.com:443/138820526/technical_drawing/Yageo-RC0402JR-07100KL.pdf?src-supplier=Upverter, ComponentLink5URL=https://sigma.octopart.com:443/138820526/technical_drawing/Yageo-RC0402JR-07100KL.pdf?src-supplier=Upverter, ComponentLink6Description=https://datasheet.octopart.com:443/RC0402JR-07100KL-Yageo-datasheet-98239111.pdf?src-supplier=Upverter, ComponentLink6URL=https://datasheet.octopart.com:443/RC0402JR-07100KL-Yageo-datasheet-98239111.pdf?src-supplier=Upverter, ComponentLink7Description=https://datasheet.octopart.com:443/RC0402JR-07100KL-Yageo-datasheet-141435361.pdf?src-supplier=Upverter, ComponentLink7URL=https://datasheet.octopart.com:443/RC0402JR-07100KL-Yageo-datasheet-141435361.pdf?src-supplier=Upverter, ComponentLink8Description=https://datasheet.octopart.com:443/RC0402JR-07100KL-Yageo-Group-datasheet-190305687.pdf?src-supplier=Future+Electronics, ComponentLink8URL=https://datasheet.octopart.com:443/RC0402JR-07100KL-Yageo-Group-datasheet-190305687.pdf?src-supplier=Future+Electronics, ComponentLink9Description=https://datasheet.octopart.com:443/RC0402JR-07100KL-Yageo-datasheet-164759695.pdf?src-supplier=Future+Electronics, ComponentLink9URL=https://datasheet.octopart.com:443/RC0402JR-07100KL-Yageo-datasheet-164759695.pdf?src-supplier=Future+Electronics, ComponentLink10Description=https://datasheet.octopart.com:443/RC0402JR-07100KL-Yageo-datasheet-137700087.pdf?src-supplier=Future+Electronics, ComponentLink10URL=https://datasheet.octopart.com:443/RC0402JR-07100KL-Yageo-datasheet-137700087.pdf?src-supplier=Future+Electronics, ComponentLink11Description=https://datasheet.octopart.com:443/RC0402JR-07100KL-Yageo-datasheet-12531192.pdf?src-supplier=Future+Electronics, ComponentLink11URL=https://datasheet.octopart.com:443/RC0402JR-07100KL-Yageo-datasheet-12531192.pdf?src-supplier=Future+Electronics, ComponentLink12Description=https://datasheet.octopart.com:443/RC0402JR-07100KL-Yageo-datasheet-505231.pdf?src-supplier=Future+Electronics, ComponentLink12URL=https://datasheet.octopart.com:443/RC0402JR-07100KL-Yageo-datasheet-505231.pdf?src-supplier=Future+Electronics, ComponentLink13Description=https://datasheet.octopart.com:443/RC0402JR-07100KL-Yageo-datasheet-62067350.pdf?src-supplier=element14+APAC, ComponentLink13URL=https://datasheet.octopart.com:443/RC0402JR-07100KL-Yageo-datasheet-62067350.pdf?src-supplier=element14+APAC, ComponentLink14Description=https://datasheet.octopart.com:443/RC0402JR-07100KL-Yageo-Group-datasheet-176638170.pdf?src-supplier=Farnell, ComponentLink14URL=https://datasheet.octopart.com:443/RC0402JR-07100KL-Yageo-Group-datasheet-176638170.pdf?src-supplier=Farnell, ComponentLink15Description=https://datasheet.octopart.com:443/RC0402JR-07100KL-Yageo-datasheet-148775077.pdf?src-supplier=TME, ComponentLink15URL=https://datasheet.octopart.com:443/RC0402JR-07100KL-Yageo-datasheet-148775077.pdf?src-supplier=TME, ComponentLink16Description=https://datasheet.octopart.com/RC0402JR-07100KL-Yageo-datasheet-73766026.pdf, ComponentLink16URL=https://datasheet.octopart.com/RC0402JR-07100KL-Yageo-datasheet-73766026.pdf, ComponentLink17Description=https://datasheet.octopart.com:443/RC0402JR-07100KL-Yageo-datasheet-8329306.pdf?src-supplier=element14, ComponentLink17URL=https://datasheet.octopart.com:443/RC0402JR-07100KL-Yageo-datasheet-8329306.pdf?src-supplier=element14, ComponentLink18Description=http://sigma.octopart.com:80/conflict_mineral_statement/Yageo-company-3.pdf?src-supplier=Compliance+Statements, ComponentLink18URL=http://sigma.octopart.com:80/conflict_mineral_statement/Yageo-company-3.pdf?src-supplier=Compliance+Statements, ComponentLink19Description=http://sigma.octopart.com:80/rohs_statement/Yageo-company-2.pdf?src-supplier=Compliance+Statements, ComponentLink19URL=http://sigma.octopart.com:80/rohs_statement/Yageo-company-2.pdf?src-supplier=Compliance+Statements, Composition="Thick Film", Country of Origin="Mainland China, Taiwan", Depth=500µm, Export Control Classification Number (ECCN) Code=EAR99, Features="Moisture Resistant", Harmonized Tariff Schedule (HTS) Code=8533.21.00.30, Height=350µm, Introduction Date=2004-10-04, Lead Free="Lead Free", Length=1mm, Lifecycle Status=Production, Manufacturer Part Number=RC0402JR-07100KL, Military Standard=Not, Mounting Technology="Surface Mount", Number of Terminals=2, Number of Terminations=2, Packaging="Tape & Reel", Pins=2, Pricing="1=0.1, 10=0.019, 25=0.0136, 50=0.0108, 100=0.0087, 250=0.0066, 500=0.00542, 1000=0.00451, 5000=0.00309 (USD)", REACH SVHC=Unaffected, RoHS=Compliant, Schedule B="8533210045, 8533210045|8533210045, 8533210045|8533210045|8533210045, 8533210045|8533210045|8533210045|8533210045", Stock=495681, Supplier=DigiKey, Termination=SMD/SMT, Voltage Rating (AC)=50V, Voltage Rating (DC)=50V, Width=500µm, Working Voltage=50V
SW1: "-30℃~+85℃ 1.6N 100,000 cycles 10mm 12V 50mA 6mm 6mm Black No Round Button SMD(SMT) Tab SPST Surface Mount,Vertical Without Bracket SMD-4P,6x6mm Tactile Switches ROHS", LCSC PART=C843652
SW2: "-30℃~+85℃ 1.6N 100,000 cycles 10mm 12V 4.5mm 4.5mm 50mA Black No Round Button SMD(SMT) Tab SPST Surface Mount,Vertical Without Bracket SMD-4P,4.5x4.5mm Tactile Switches ROHS", LCSC PART=C963232
U1: library part AT24C02C-STUM-TQN, "SOT-23-5 EEPROM ROHS", LCSC PART=C53432858
U2: "0.7Vin Synchronous Boost Converter with 800 nA Ultra-Low Quiescent Current 6-DSBGA -40 to 85", LCSC PART=C2650335, Manufacturer="Texas Instruments", Manufacturer Lifecycle Status=ACTIVE, Max Junction Temperature (Tj)=125°C, Max Operating Temperature=85°C, Max Supply Voltage=5.5V, Min Operating Temperature=-40°C, Min Supply Voltage=700mV, Output Voltage=3.3V, Supplier Part Number=595-TPS610994YFFR, Category="Voltage Regulators - Switching", ComponentLink1Description=https://sigma.octopart.com:443/102708341/technical_drawing/Texas-Instruments-TPS610994YFFR.pdf?src-supplier=Texas+Instruments, ComponentLink1URL=https://sigma.octopart.com:443/102708341/technical_drawing/Texas-Instruments-TPS610994YFFR.pdf?src-supplier=Texas+Instruments, ComponentLink2Description=https://octopart.com:443/opatz8j6/c1?t=WOiHvKaQ067hiQQk06bPYYslmHf-zaa3unEVrq9qYLczSXfiPFC-h8dOU4ZzEJWJ-3zVqLEiJ1NTVRQ16sGiV55YDbzD3HBkKnSXs-RsLCKyAcUbpQj7xvoyysaqZ7Oc1gKVNqvQ8SoMUzEX8GOGxTP5Y993wEQnOiTvq_853BI-Pbs60xAFN0vAmsIcv9lA6aczl1DkB1H55CnBoDy0Obp3Qs-5Gen7NY_QyS_GtTt-B59J7t-Jb0lEJ-YhjT9CdvlpxQ4dLvniqV2lj0u-vF2n_rYHtxfKm3rNU71zEqcYZAIdQlGa-m51ft3SeFY18n9yUhh33H1WXzCYD56EToUdLA34T5fgFPxH_XlcftoHbzZRZ9CiDyimrKS1GAX1Yc7w0diQ&src-supplier=Texas+Instruments, ComponentLink2URL=https://octopart.com:443/opatz8j6/c1?t=WOiHvKaQ067hiQQk06bPYYslmHf-zaa3unEVrq9qYLczSXfiPFC-h8dOU4ZzEJWJ-3zVqLEiJ1NTVRQ16sGiV55YDbzD3HBkKnSXs-RsLCKyAcUbpQj7xvoyysaqZ7Oc1gKVNqvQ8SoMUzEX8GOGxTP5Y993wEQnOiTvq_853BI-Pbs60xAFN0vAmsIcv9lA6aczl1DkB1H55CnBoDy0Obp3Qs-5Gen7NY_QyS_GtTt-B59J7t-Jb0lEJ-YhjT9CdvlpxQ4dLvniqV2lj0u-vF2n_rYHtxfKm3rNU71zEqcYZAIdQlGa-m51ft3SeFY18n9yUhh33H1WXzCYD56EToUdLA34T5fgFPxH_XlcftoHbzZRZ9CiDyimrKS1GAX1Yc7w0diQ&src-supplier=Texas+Instruments, ComponentLink3Description=https://sigma.octopart.com:443/49261954/technical_drawing/Texas-Instruments-TPS610994YFFR.pdf?src-supplier=Texas+Instruments, ComponentLink3URL=https://sigma.octopart.com:443/49261954/technical_drawing/Texas-Instruments-TPS610994YFFR.pdf?src-supplier=Texas+Instruments, ComponentLink4Description=https://datasheet.octopart.com:443/TPS610994YFFR-Texas-Instruments-datasheet-159752691.pdf?src-supplier=LCSC, ComponentLink4URL=https://datasheet.octopart.com:443/TPS610994YFFR-Texas-Instruments-datasheet-159752691.pdf?src-supplier=LCSC, ComponentLink5Description=https://datasheet.octopart.com:443/TPS610994YFFR-Texas-Instruments-datasheet-94062300.pdf?src-supplier=HQonline, ComponentLink5URL=https://datasheet.octopart.com:443/TPS610994YFFR-Texas-Instruments-datasheet-94062300.pdf?src-supplier=HQonline, ComponentLink6Description=https://datasheet.octopart.com:443/TPS610994YFFR-Texas-Instruments-datasheet-140571912.pdf?src-supplier=Arrow.cn, ComponentLink6URL=https://datasheet.octopart.com:443/TPS610994YFFR-Texas-Instruments-datasheet-140571912.pdf?src-supplier=Arrow.cn, ComponentLink7Description=http://sigma.octopart.com:80/reach_statement/Texas-Instruments-company-64.pdf?src-supplier=Compliance+Statements, ComponentLink7URL=http://sigma.octopart.com:80/reach_statement/Texas-Instruments-company-64.pdf?src-supplier=Compliance+Statements, ComponentLink8Description=http://sigma.octopart.com:80/conflict_mineral_statement/Texas-Instruments-company-63.pdf?src-supplier=Compliance+Statements, ComponentLink8URL=http://sigma.octopart.com:80/conflict_mineral_statement/Texas-Instruments-company-63.pdf?src-supplier=Compliance+Statements, Height=625µm, Length=0m, Lifecycle Status=Production, Manufacturer Part Number=TPS610994YFFR, Max Duty Cycle=90%, Number of Outputs=1, Pins=6, Pricing="1=1.7, 10=1.24, 50=1.13, 100=0.999, 1000=0.88, 10000=0.792 (USD)", RoHS=Compliant, Schedule B="8542390000, 8542390000|8542390000|8542390000|8542390000|8542390000", Stock=918, Supplier=Mouser, Thickness=535µm, Topology=Boost, Width=0m